# EAGLE board LED Board V2 (EAGLE 7.5.0)
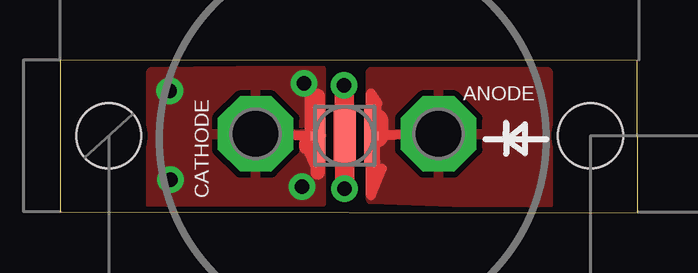
[diagram p0: board, top side]
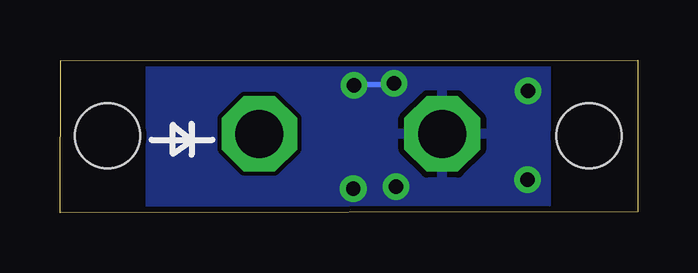
[diagram p1: board, bottom side, seen from below]

Size 24.08 x 6.39 mm. Coordinates in mm from the lower left corner, seen from the top.
Outline: 0,0.05 24.08,0 24.05,6.37 0,6.39 0,0.05
Copper layers (1*16): Top 0.035mm / dielectric 1.5mm / Bottom 0.035mm
Design rules "GoldPhoenix": minimum track width 7mil, minimum drill 10mil, track to track 7mil, track to pad 7mil, pad to pad 7mil, via to via 7mil, smd to smd 7mil, copper to edge 10mil, drill to drill 8mil, minimum pad ring 10mil, minimum via ring 10mil, stop-mask expansion 4mil, vias tented up to drill 25mil, thermal gap 10mil
Holes 2.71 mm at 22.1,3.23 2.03,3.23

## Footprints (pad centres in the part's own frame; a part is rotated, then mirrored left to right if it is on the bottom)
P1-20 = drill 2.007 pad 3.15 octagon: TP 0,0
CREE-XLAMP-XM-L = smd 0.33 x 2.29: A 0.985,0; C1 -1,0 | smd 0.28 x 0.36: A@1 1.27,0; C@1 -1.27,0 | smd 0.36 x 2.34: C -0.985,0 | smd 0.92 x 2.29: EXP 0,0

## Placement (x,y rotation side)
ANODE  PTR1PAD1-20  [P1-20]  15.77,3.3 0 top
CATHODE  PTR1PAD1-20  [P1-20]  8.15,3.3 0 top
D1  CREE  [CREE-XLAMP-XM-L]  11.86,3.23 0 top

## Library data of the parts
ANODE CATHODE = testpad
D1 = 2015_LED_Driver

## Nets
ANODE: ANODE.TP D1.A D1.A@1
CATHODE: CATHODE.TP D1.C D1.C1 D1.C@1

## Tracks (layer width: path | path; a pad name or v marks a point on that pad's centre or on a via)
ANODE
  Top 0.254: D1.A 13.19,3.23
  Top 0.305: 12.95,5 13.23,4.37 | 13.23,4.37 13.23,4.57 | 13.23,4.37 13.19,3.83 D1.A@1
  Top 0.406: ANODE.TP D1.A@1 | 13.06,4.29 13.13,1.9 13.18,1.85 13.41,1.85 12.95,0.74 12.95,5 13.23,4.57
  Top 1.016: 13.19,3.23 13.19,3.83
  pour Top: 12.95,5.89 20.32,5.89 20.32,0.3 12.95,0.56
CATHODE  (via drill 0.6)
  Top 0.254: 10.74,4.88 10.41,4.88 10.41,5.38
  Top 0.305: D1.C1 D1.C@1
  Top 0.406: CATHODE.TP D1.C@1 | D1.C@1 10.69,2.03 10.62,2.03 10.74,1.7 10.19,2.95 10.19,2.69 10.26,2.69 10.26,3.17 10.39,3.17 10.39,5.11 10.74,4.88 | D1.C D1.C@1
  Top 0.61: 10.74,1.7 10.74,4.88
  Top 0.813: v11.86,1.02 11.84,5.31
  Bottom 0.254: v11.84,5.33 v10.16,5.41
  other vias: 4.57,5.11 4.6,1.4 10.08,1.09
  pour Top: 3.81,5.89 10.87,5.99 10.87,0.41 3.81,0.3
  pour Bottom: 3.81,6.4 20.32,6.4 20.32,0.05 3.81,0.05
  pour Top: 12.09,2.95 12.12,2.95 12.09,2.84

## Text on the board
tDocu: LENS OUTLINE / 0.634 diameter | all measurements in inches